# Altium PCB ESD-MAIN_PCB.PcbDoc
Units mm, origin at the board's own origin, x right, y up, seen from the top; angles counter-clockwise.
Board outline 75 x 100 mm, 2 copper layers (Top Layer, Bottom Layer), stack 1.57 mm thick; 48 components, 27 nets, 161 pads, 0 vias.
Unrouted connection lines stored in the file: 43.
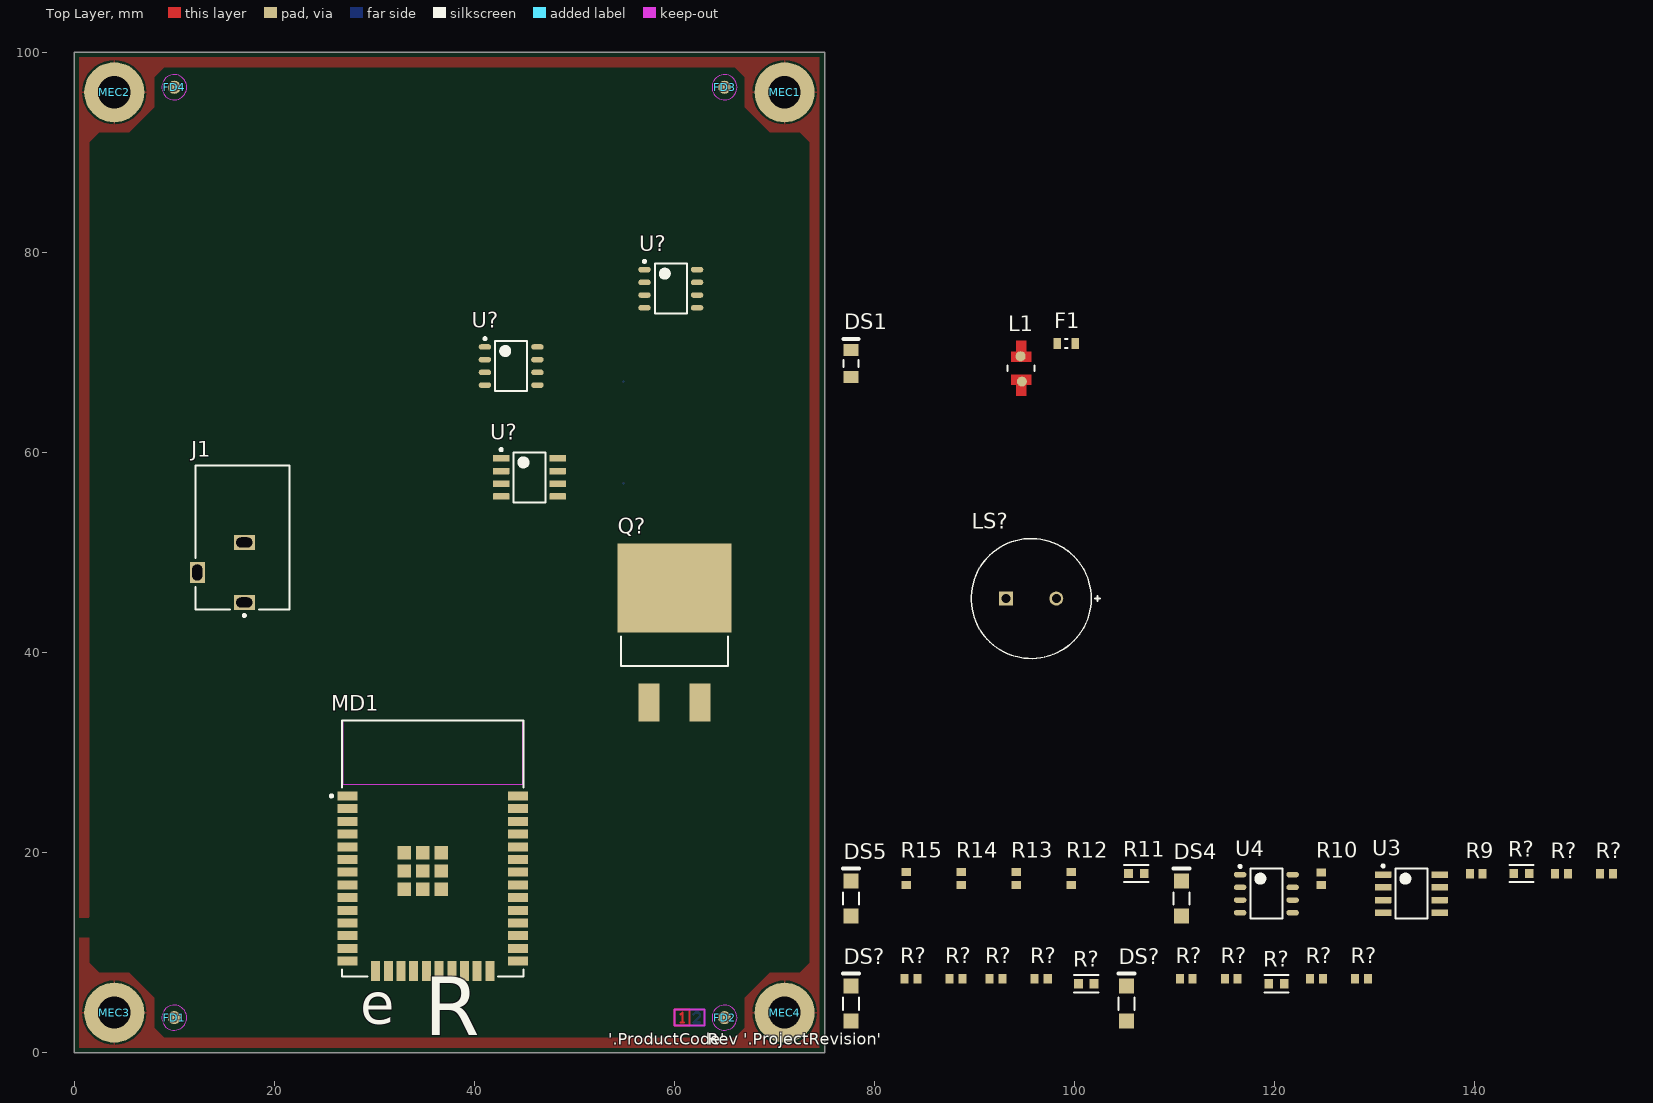
[diagram p0: Top Layer view]
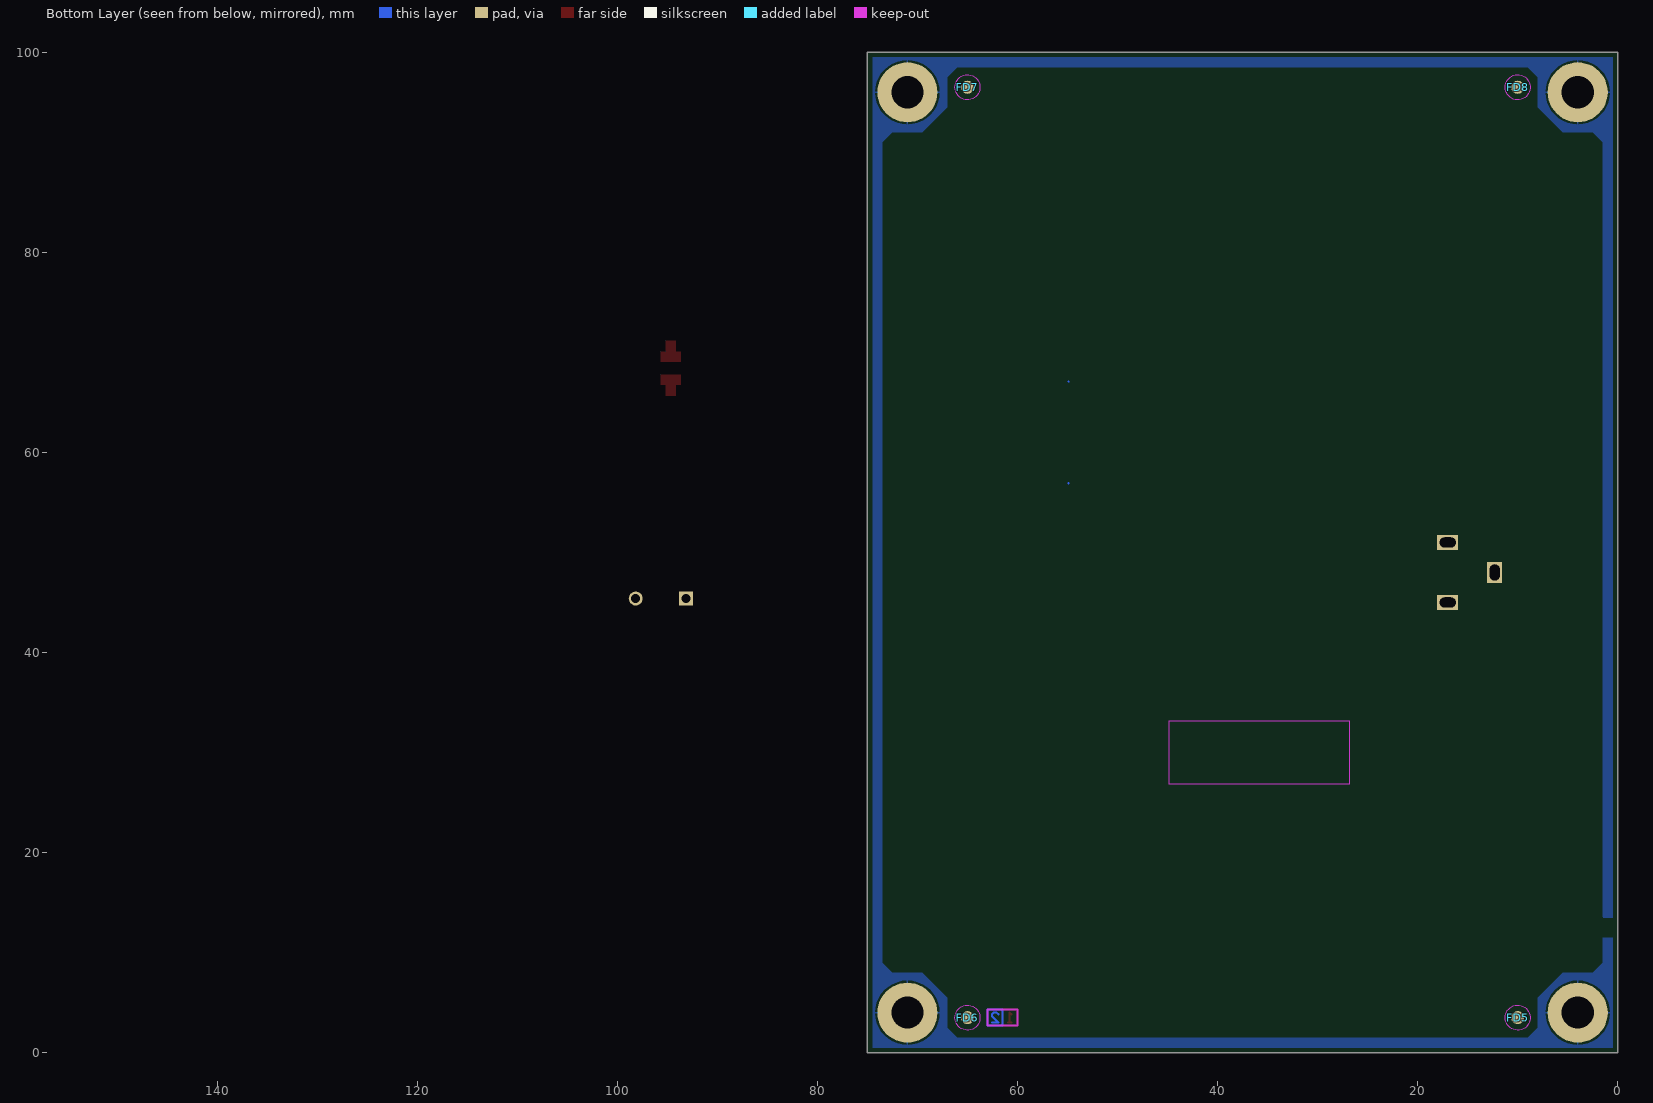
[diagram p1: Bottom Layer view, seen from below]

## Layer stack, top to bottom
Top Solder: solder mask 0.013, Solder Resist, Dk 3.5
Top Layer: signal copper 0.035
Dielectric 1: core 1.5, FR-4, Dk 4.2
Bottom Layer: signal copper 0.035
Bottom Solder: solder mask 0.013, Solder Resist, Dk 3.5

## Board outline
0,0 75,0 75,100 0,100

## Design rules (kind name [scope] priority, off if disabled: settings)
BoardOutlineClearance BoardOutlineClearance_layers [WithinRoom('layers_room')] p1: gap=0 ignorepadtopadclearanceinfootprint=FALSE
BoardOutlineClearance [All] p2: gap=0.5 ignorepadtopadclearanceinfootprint=FALSE
Clearance EARTH_Clearance [InNet('EARTH')] p1: gap=0.5 ignorepadtopadclearanceinfootprint=TRUE
Clearance [All] p2: gap=0.2 ignorepadtopadclearanceinfootprint=TRUE
DiffPairsRouting Diff_100ohmDiffPairsRouting [InDifferentialPairClass('Diff_100ohm')] p1: maxlimit=0.2 minlimit=0.2 mostfreqgap=0.2 toplayer_minwidth=0.16 toplayer_maxwidth=0.16 toplayer_prefwidth=0.16 bottomlayer_minwidth=0.16 bottomlayer_maxwidth=0.16 bottomlayer_prefwidth=0.16 maxuncoupledlength=12.7
DiffPairsRouting Diff_90ohmDiffPairsRouting [InDifferentialPairClass('Diff_90ohm')] p2: maxlimit=0.2 minlimit=0.2 mostfreqgap=0.2 toplayer_minwidth=0.2 toplayer_maxwidth=0.2 toplayer_prefwidth=0.2 bottomlayer_minwidth=0.2 bottomlayer_maxwidth=0.2 bottomlayer_prefwidth=0.2 maxuncoupledlength=5
DiffPairsRouting [All] p3: maxlimit=0.2 minlimit=0.2 mostfreqgap=0.2 toplayer_minwidth=0.16 toplayer_maxwidth=0.3 toplayer_prefwidth=0.2 bottomlayer_minwidth=0.16 bottomlayer_maxwidth=0.3 bottomlayer_prefwidth=0.2 maxuncoupledlength=12.7
HoleSize [All] p1: absolutevalues=TRUE maxlimit=6 minlimit=0.2 maxpercent=80.000 minpercent=20.000
HoleToHoleClearance [All] p1: gap=0.25 allowstackedmicrovias=TRUE
MatchedLengths ETH_iterpair_skew [InNetClass('ETH')] p1: tolerance=1.2 checknetsindiffpair=FALSE checkdiffpairvsdiffpair=TRUE checkxsignals=TRUE checkothers=TRUE
MatchedLengths GETH_interpair_skew [InNetClass('GETH')] p2: tolerance=15.2 checknetsindiffpair=FALSE checkdiffpairvsdiffpair=TRUE checkxsignals=TRUE checkothers=TRUE
MatchedLengths Diff_100ohm_intrapair_skew [InDifferentialPairClass('Diff_100ohm')] p3: tolerance=1.2 checknetsindiffpair=TRUE checkdiffpairvsdiffpair=FALSE checkxsignals=FALSE checkothers=FALSE
MatchedLengths Diff_90ohm_intrapair_skew [InDifferentialPairClass('Diff_90ohm')] p4: tolerance=1.2 checknetsindiffpair=TRUE checkdiffpairvsdiffpair=FALSE checkxsignals=FALSE checkothers=FALSE
MinimumSolderMaskSliver [All] p1: minsoldermaskwidth=0.01
PlaneClearance [All] p1: clearance=0.2
PlaneConnect [All] p1: pad.planeconnectstyle=Relief pad.reliefexpansion=0.2 pad.reliefentries=4 pad.reliefconductorwidth=0.2 pad.reliefairgap=0.2 via.planeconnectstyle=Direct via.reliefexpansion=0.2 via.reliefentries=4 via.reliefconductorwidth=0.2 via.reliefairgap=0.2
PolygonConnect [All] p1: thpad.connectstyle=Relief thpad.reliefconductorwidth=0.2 thpad.reliefentries=4 thpad.polygonreliefangle="90 Angle" thpad.airgapwidth=0.2 smdpad.connectstyle=Relief smdpad.reliefconductorwidth=0.2 smdpad.reliefentries=4 smdpad.polygonreliefangle="90 Angle" smdpad.airgapwidth=0.2 via.connectstyle=Direct via.reliefconductorwidth=0.2 via.reliefentries=4 via.polygonreliefangle="90 Angle" via.airgapwidth=0.2
RoutingVias [All] p1: holewidth=0.3 width=0.5 viastyle="Through Hole" minholewidth=0.2 minwidth=0.4 maxholewidth=1 maxwidth=1.6
SilkToSilkClearance [All] p1: silktosilkclearance=0.08
SilkToSolderMaskClearance [IsPad] p1: minsilkscreentomaskgap=0.06 clearancetoexposedcopper=TRUE
SolderMaskExpansion [All] p1: expansion=0.1 istentingtop=FALSE
SupplyNets "Schematic Supply Nets_8" [InNet('ERR_LO_PROG-')] p1: voltage=0.000
SupplyNets "Schematic Supply Nets_7" [InNet('ERR_HI_PROG+')] p2: voltage=0.000
SupplyNets "Schematic Supply Nets_6" [InNet('5V')] p3: voltage=0.000
SupplyNets "Schematic Supply Nets_5" [InNet('AGND')] p4: voltage=0.000
SupplyNets "Schematic Supply Nets_3" [InNet('EARTH')] p5: voltage=0.000
SupplyNets "Schematic Supply Nets_2" [InNet('3V3')] p6: voltage=0.000
SupplyNets "Schematic Supply Nets_1" [InNet('24VIN')] p7: voltage=0.000
SupplyNets "Schematic Supply Nets" [InNet('VBAT')] p8: voltage=0.000
Width [All] p1: maxlimit=6 minlimit=0.16 preferedwidth=0.2
22 further rules are at their usual default settings.

## Classes and differential pairs
component class ESD-OP: C7 C8 DS4 DS5 R9 R10 R11 R12 R13 R14 R15 R? U3 U4
component class ESD-MATT: DS? R?
component class Sheet2: C1 C2 C3 C4 DS1 F1 J1 L1 LS? Q? R1
component class ESD-HISTORY: _PCB1 FD1 FD2 FD3 FD4 FD5 FD6 FD7 FD8 MEC1 MEC2 MEC3 MEC4
component class ESD-ESP32: MD1

## Components (designator, comment, footprint, x,y, rotation, side; value= is the part's Value field where it differs from the comment)
DS1 "SML-LX1206IC-TR" LUMX-SML-LX1206IC_V 77.656,68.894 r90 top
DS4 "HSMH-C150" AVAG-HSMX-C150_V 110.656,15.394 r90 top
DS5 "HSMH-C150" AVAG-HSMX-C150_V 77.656,15.394 r90 top
DS? "HSMH-C150" AVAG-HSMX-C150_V 77.656,4.894 r90 top
DS? "HSMH-C150" AVAG-HSMX-C150_V 105.156,4.894 r90 top
F1 "0467.375NR" FP-467-MFG 99.156,70.894 r0 top
FD1 "Fiducial 1.3" "Fiducial 1.3mm" 10,3.5 r0 top
FD2 "Fiducial 1.3" "Fiducial 1.3mm" 65,3.5 r270 top
FD3 "Fiducial 1.3" "Fiducial 1.3mm" 65,96.5 r270 top
FD4 "Fiducial 1.3" "Fiducial 1.3mm" 10,96.5 r0 top
FD5 "Fiducial 1.3" "Fiducial 1.3mm" 10,3.5 r180 bottom
FD6 "Fiducial 1.3" "Fiducial 1.3mm" 65,3.5 r180 bottom
FD7 "Fiducial 1.3" "Fiducial 1.3mm" 65,96.5 r270 bottom
FD8 "Fiducial 1.3" "Fiducial 1.3mm" 10,96.5 r180 bottom
J1 "PJ-102B" CUI-PJ-102B_V 17,48 r90 top
L1 "LQH32CN101K23L" FP-LQH32CH_23-MFG 94.656,68.394 r90 top
LS? "SD1209T5-A1" FP-SD1209-MFG 95.656,45.394 r0 top
MD1 "ESP32-WROOM-32" FP-ESP32-WROOM-32-MFG 35.835,20.405 r0 top
MEC1 "M3" "M3 hole" 71,96 r0 top
MEC2 "M3" "M3 hole" 4,96 r0 top
MEC3 "M3" "M3 hole" 4,4 r0 top
MEC4 "M3" "M3 hole" 71,4 r0 top
Q? "IRLZ34NSTRLPBF" FP-PG-TO263-3-MFG 60,42 r0 top
R9 "CRCW06035M10FKEA" RESC1609X50X30NL10T20 140.156,17.894 r0 top
R10 "CRCW06035M10FKEA" RESC1609X50X30NL10T20 124.656,17.394 r90 top
R11 "AC0603FR-072KL" FP-AC0603-IPC_B 106.156,17.894 r0 top
R12 "CRCW0603100K0FKEA" RESC1609X50X30NL8T20 99.656,17.394 r90 top
R13 "CRCW060310K0FKEA" RESC1609X50X30NL8T20 94.156,17.394 r90 top
R14 "CRCW060310K0FKEA" RESC1609X50X30NL8T20 88.656,17.394 r90 top
R15 "CRCW0603100K0FKEA" RESC1609X50X30NL8T20 83.156,17.394 r90 top
R? "CRCW060310K0FKEA" RESC1609X50X30NL8T20 88.156,7.394 r0 top
R? "AC0603FR-072KL" FP-AC0603-IPC_B 120.156,6.894 r0 top
R? "CRCW06035M10FKEA" RESC1609X50X30NL10T20 115.656,7.394 r0 top
R? "CRCW06035M10FKEA" RESC1609X50X30NL10T20 111.156,7.394 r0 top
R? "CRCW0603100K0FKEA" RESC1609X50X30NL8T20 96.656,7.394 r0 top
R? "CRCW060310K0FKEA" RESC1609X50X30NL8T20 124.156,7.394 r0 top
R? "AC0603FR-072KL" FP-AC0603-IPC_B 101.156,6.894 r0 top
R? "AC0603FR-072KL" FP-AC0603-IPC_B 144.656,17.894 r0 top
R? "CRCW060310K0FKEA" RESC1609X50X30NL8T20 148.656,17.894 r0 top
R? "CRCW060310K0FKEA" RESC1609X50X30NL8T20 153.156,17.894 r0 top
R? "CRCW060310K0FKEA" RESC1609X50X30NL8T20 92.156,7.394 r0 top
R? "CRCW060310K0FKEA" RESC1609X50X30NL8T20 128.656,7.394 r0 top
R? "CRCW0603100K0FKEA" RESC1609X50X30NL8T20 83.656,7.394 r0 top
U3 "TLV2372IDR" D0008A_M 133.656,15.894 r0 top
U4 "LM393DT" STM-SO-8_D_L 119.156,15.894 r0 top
U? "LM393DT" STM-SO-8_D_L 59.625,76.365 r0 top
U? "TLV2372IDR" D0008A_M 45.5,57.5 r0 top
U? "LM393DT" STM-SO-8_D_L 43.675,68.635 r0 top

## Footprints (in the part's own frame and the unit in brackets; to place one, negate y for a bottom-side part, rotate by r counter-clockwise, add the part's x,y. Pads: shape width x height; smd on the part's side, far side on the other; paste and mask are expansions set on the pad)
AVAG-HSMX-C150_V [mm] "SMD, 2-Leads, Body 3.2x1.6mm"
  rect 1.5x1.5 smd: 1(-1.75,0) 2(1.75,0)
  silkscreen extent -0.6,-0.8 3,0.8, body extent -1.6,-0.8 1.6,0.8, height 1.1
CUI-PJ-102B_V [mm] "THD, 3-Leads, Body 14.4x9mm, Height 11mm"
  rect 1.5x2.1 hole 1 slot 1.6 at 90 deg: 1(-3,0) 2(3,0)
  rect 2.1x1.5 hole 1 slot 1.6 at 0 deg: 3(0,4.7)
  silkscreen extent -4.42,-4.5 10.7,4.9, body extent -3.7,-4.5 10.7,4.9, height 11
D0008A_M [mm] "SOIC, 8-Leads, Body 5x4mm, Pitch 1.27mm, IPC Low Density"
  rrect15% 1.65x0.65 smd: 1(-2.825,1.905) 2(-2.825,0.635) 3(-2.825,-0.635) 4(-2.825,-1.905) 5(2.825,-1.905) 6(2.825,-0.635) 7(2.825,0.635) 8(2.825,1.905)
  silkscreen extent -2.95,-2.5 1.6,2.9, body extent -3,-2.45 3,2.45, height 1.63
"Fiducial 1.3mm" [mm]
  round 1.3 smd mask+0.6: FD0(0,0)
  Top Layer keep-out circle w0.1: c0,0 r1.25
FP-467-MFG [mm]
  rect 0.762x1.09 smd paste+0 mask+0: 1(-0.891,0) 2(0.891,0)
  silkscreen extent -0.14,-0.44 0.14,0.44, body extent -1.37,-0.64 1.37,0.64, height 0.25
FP-AC0603-IPC_B [mm]
  rect 0.859x0.912 smd paste+0 mask+0: 1(-0.777,0) 2(0.777,0)
  silkscreen extent -1.21,-0.86 1.21,0.86, body extent -1.46,-0.71 1.46,0.71, height 0.25
FP-ESP32-WROOM-32-MFG [mm]
  rect 2x0.9 smd paste+0 mask+0: 1(-8.5,5.26) 2(-8.5,3.99) 3(-8.5,2.72) 4(-8.5,1.45) 5(-8.5,0.18) 6(-8.5,-1.09) 7(-8.5,-2.36) 8(-8.5,-3.63) 9(-8.5,-4.9) 10(-8.5,-6.17) 11(-8.5,-7.44) 12(-8.5,-8.71) 13(-8.5,-9.98) 14(-8.5,-11.25) 25(8.5,-11.25) 26(8.5,-9.98) 27(8.5,-8.71) 28(8.5,-7.44) 29(8.5,-6.17) 30(8.5,-4.9) 31(8.5,-3.63) 32(8.5,-2.36) 33(8.5,-1.09) 34(8.5,0.18) 35(8.5,1.45) 36(8.5,2.72) 37(8.5,3.99) 38(8.5,5.26)
  rect 0.9x2 smd paste+0 mask+0: 15(-5.715,-12.25) 16(-4.445,-12.25) 17(-3.175,-12.25) 18(-1.905,-12.25) 19(-0.635,-12.25) 20(0.635,-12.25) 21(1.905,-12.25) 22(3.175,-12.25) 23(4.445,-12.25) 24(5.715,-12.25)
  rect 1.33x1.33 smd paste+0 mask+0: 39(-2.835,-4.075) 39(-2.835,-2.24) 39(-2.835,-0.405) 39(-1,-4.075) 39(-1,-2.24) 39(-1,-0.405) 39(0.835,-4.075) 39(0.835,-2.24) 39(0.835,-0.405)
  Keep-Out Layer region: -9,6.45 9,6.45 9,12.75 -9,12.75
  Keep-Out Layer region: -9,6.45 9,6.45 9,12.75 -9,12.75
  silkscreen extent -10.25,-12.8 9.05,12.8, body extent -9.6,-13.35 9.6,12.9, height 0.25
FP-LQH32CH_23-MFG [mm]
  round 0.995 smd paste+0 mask+0: 1(-1.312,-0.062)
  round 1.012 smd paste+0 mask+0: 2(1.212,0.062)
  Top Layer region: 0.65,-1 0.65,1 1.65,1 1.65,0.5 2.75,0.5 2.75,-0.5 1.65,-0.5 1.65,-1
  Top Layer region: -1.65,-1 -1.65,-0.5 -2.75,-0.5 -2.75,0.5 -1.65,0.5 -1.65,1 -0.65,1 -0.65,-1
  silkscreen extent -0.27,-1.35 0.27,1.35, body extent -2.85,-1.45 2.85,1.45, height 0.25
FP-PG-TO263-3-MFG [mm]
  rect 2.08x3.81 smd paste+0 mask+0: 1(-2.54,-6.985) 3(2.54,-6.985)
  rect 11.43x8.89 smd paste+0 mask+0: 4(0,4.445)
  silkscreen extent -5.34,-3.36 5.34,-0.38, body extent -5.81,-8.99 5.81,8.99, height 0.25
FP-SD1209-MFG [mm]
  rect 1.4x1.4 hole 0.9 paste-2539.97 mask+0: 1(-2.5,0)
  round 1.4 hole 0.9 paste-2539.97 mask+0: 2(2.5,0)
  silkscreen extent -6,-6 6.85,6, body extent -6.1,-6.1 6.1,6.1, height 0.25
LUMX-SML-LX1206IC_V [mm] "SMD, 2-Leads, Body 3.2x1.5mm"
  rect 1.2x1.5 smd: 1(-1.35,0) 2(1.35,0)
  silkscreen extent -0.35,-0.75 2.45,0.75, body extent -1.6,-0.8 1.6,0.8, height 1.1
"M3 hole" [mm]
  round 6 hole 3.2: 0(0,0)
RESC1609X50X30NL8T20 [mm] "Chip Resistor, 2-Leads, Body 1.65x0.95mm, IPC Medium Density"
  rect 0.8x0.95 smd: 1(-0.65,0) 2(0.65,0)
  body extent -0.82,-0.48 0.82,0.48, height 0.5
RESC1609X50X30NL10T20 [mm] "Chip Resistor, 2-Leads, Body 1.55x0.85mm, IPC Medium Density"
  rect 0.8x0.95 smd: 1(-0.625,0) 2(0.625,0)
  body extent -0.82,-0.48 0.82,0.48, height 0.5
STM-SO-8_D_L [mm] "SOIC, 8-Leads, Body 5x4mm, Pitch 1.27mm, IPC High Density"
  oval 1.25x0.55 smd: 1(-2.625,1.905) 2(-2.625,0.635) 3(-2.625,-0.635) 4(-2.625,-1.905) 5(2.625,-1.905) 6(2.625,-0.635) 7(2.625,0.635) 8(2.625,1.905)
  silkscreen extent -2.75,-2.5 1.6,2.85, body extent -3,-2.5 3,2.5, height 1.75

## Part data
DS1: library part CMP-2000-07123-1, "LED Red, 65 mW, -40 to 85 degC, 2-Pin SMD, RoHS, Tape and Reel", Color=Red, Manufacturer=Lumex, Operating Temperature=-25to85C, Package Description="2-Pin Surface Mount Device, Body 3.2 x 1.5 mm", Package Reference=SML-LX1206IC, Reverse Voltage=5(Min)V, Supplier_Package=SMD, Datasheet URL=http://www.lumex.com/content/files/ProductAttachment/SML-LX1206IC-TR.pdf, Datasheet Version="Rev. J, 08/2012", Dimension=3.2x1.6x1.1mm, Dominant Wavelength=N/A, ECCN=EAR99, Family=SML-LX1206IC, HTS=8541402000, Intensity=6mcd, LED Material=GaAsP, Lens Appearance=ColorlessNonDiffused, Lens Dimensions=2x1.6x0.5mm, Manufacturer URL=http://www.lumexinstruments.com/, Mounting=SurfaceMount, Mounting Technology=SurfaceMount, Number of LEDs=1, Packaging=TapeandReel, Part No=SML-LX1206IC-TR, Peak Wavelength=635nm, Pin_Count=2, RoHS=Unknown, Supplier=Lumex, Supplier Standard Pack=3,000, Type=Uni-Color, Viewing Angle=160
DS4 DS5 DS? DS?: library part CMP-2000-06426-1, "LED Uni-Color Red, 65 mW, 25 mA, -40 to 85 degC, 2-Pin SMD, RoHS, Tape and Reel", Emitting Color=Red, Forward Current=25mA, Forward Voltage=2.6V, Manufacturer=Avago, Operating Temp Range=-40Cto85C, Operating Temperature Classification=Industrial, Package Description="2-Pin Surface Mount Device, Body 3.2 x 1.6 mm", Package Reference=HSMX-C150, Package Type=ChipLed, Power Dissipation=78W, Reverse Voltage=5V, Test Current (It)=20mA, Chip Material=GaAlAs, Datasheet URL=http://media.digikey.com/pdf/Data%20Sheets/Avago%20PDFs/HSMz-Czzz.pdf, Datasheet Version=03/2012, DELETED=Compliant, Dominant Wave Length=639nm, High Brightness=No, Lens Dimensions=2x1.6x0.6mm, Lens Type=ColorlessDiffused, Lum Intensity=17mcd, Luminous Intensity=17mcd, Main Category=ChipLED, Manufacturer URL=http://www.avagotech.com/, Mounting=SurfaceMount, Mounting Technology=SurfaceMount, Number of  Elements=1, Packaging=TapeandReel, Peak Wavelength=660nm, Pin Count=2, Product Depth (mm)=1.6mm, Product Height (mm)=1.1mm, Product Length (mm)=3.2mm, Rad Hardened=No, Shape Type=Rectangular, Type=Uni-Color, Viewing Angle=170deg
F1: library part CMP-08605-000028-1, "FUSE BOARD MOUNT 375MA 32VAC/VDC", Fuse Current=0.375A, Fuse Interrupt Ac Current=50A, Manufacturer=Littelfuse, Max Fuse Ac Voltage=32V, Package=467, Temperature="-55°C to +90°C", Temperature Range High=+90°C, Temperature Range Low=-55°C, Automotive=No, Category=Fuse, ComponentLink2Description=Datasheet, ComponentLink2URL=https://www.littelfuse.com/~/media/electronics/datasheets/fuses/littelfuse_fuse_467_datasheet.pdf.pdf, Device Class L1="Circuit Protection", Device Class L2=Fuses, Device Class L3=unset, Digikey Description="FUSE BOARD MOUNT 375MA 32VAC/VDC", Fuse Blow Speed=Fast, Fuse I2T=0.0035A2Sec, Fuse Interrupt Dc Current=50A, Height=0.432mm, Lead Free=Yes, Manufacturer Part Number=0467.375NR, Max Fuse Dc Voltage=32V, Mouser Description="Surface Mount Fuses 32V.375A VFA Slimline", Octopart=https://octopart.com/0467.375nr-littelfuse-565971, RoHS=TRUE, Voltage Rating=32V
FD1 FD2 FD3 FD4 FD5 FD6 FD7 FD8: "Fiducial 1.3mm"
J1: library part CMP-2000-06900-1, "Through Hole Right Angle DC Power Jack, 2.5 A, 2.5 mm Center Pin, 3 Position, -25 to 85 degC, RoHS, Bulk", Current Rating=2.5A, Flammability Rating=UL94V-0, Insulation Resistance=100MOhms, Manufacturer=CUIInc., Operating Temperature Range=-25Cto+85C, Package Description="3-Pin Through Hole Device, Body 14.4 x 9 mm, Height 11 mm", Voltage Rating=24V, Brand=CUI, Connector Type=DCPowerJack, Contact Gender=Male, Contact Material=Copper, Contact Plating=Nickel, Datasheet URL=http://www.cui.com/product/resource/pj-102b.pdf, Datasheet Version="Rev. 1.03, 04/2016", Factory Pack Quantity=280, Housing Material=PolybutyleneTerephthalate(PBT), Inside Contact Diameter=2.5mm, Manufacturer URL=http://www.cui.com/, Mounting Angle=Right, Mounting Style=ThroughHole, Mounting Technology=ThroughHole, Outside Contact Diameter=6.5mm, Package Reference=PJ-102B, Packaging=Bulk, Product=Jacks, Product Category=DCPowerConnectors, RoHS=True, Termination Style=ThroughHole
L1: library part CMP-06042-006648-2, "Wire Wound Ferrite Inductor for Power Lines 100μH ±10% 4.55Ω 100mA 1210", Case Code (Imperial)=1210, Case Code (Metric)=3225, Current=1.1A, Current Rating=100mA, DC Resistance (DCR)=3.5R, Frequency=10MHz, Inductance=100uH, Inductance Tolerance=10%, Inductor Type=Wirewound, Max Operating Temperature=85°C, Min Operating Temperature=-40°C, Package Quantity=2000, Test Frequency=1MHz, Case/Package=1210, Core Material=Ferrite, DC Current=100mA, Depth=2.7mm, Height=2mm, Lead Free="Lead Free", Length=3.2mm, Max DC Current=100mA, Military Standard=Not, Mount="Surface Mount", Number of Pins=2, Packaging="Tape and Reel", Q Factor=40, Radiation Hardening=No, Rated Current-Max=100mA, REACH SVHC="No SVHC", RoHS Compliant=Yes, Self Resonant Frequency=10MHz, Series=LQH32C_33, Shielding=Unshielded, Termination=SMD/SMT, Tolerance=10%, Weight=0.002116oz, Width=2.5mm
LS?: library part CMP-08413-000009-1, "AUDIO MAGNETIC XDCR 3-6V TH", Current Rating=60mA, Frequency=2.048kHz, Max Operating Temperature=85°C, Min Operating Temperature=-40°C, Operating Supply Voltage=5V, Package Quantity=100, Self Resonant Frequency=2.05kHz, Diameter=12mm, Height=9mm, Lead Free="Lead Free", Max Supply Current=60mA, Mount="Through Hole", Number of Pins=2, Number of Terminals/Pins=2, Operating Supply Current=60mA, Packaging=Tray, Sensing Method=Magnetic, Series=SD, Termination="PC Pins", Voltage Rating (DC)=5V, Washable=No
MD1: library part CMP-194065-000008-1, "RX TXRX MOD WIFI SURFACE MOUNT", Case/Package=SMD/SMT, Frequency=2.5GHz, Max Operating Temperature=85°C, Min Operating Temperature=-40°C, Operating Supply Voltage=3.6V, Package Quantity=550, Data Rate=150Mbps, Mount="Surface Mount", Packaging="Cut Tape", Sensitivity=-98dBm, Weight=0.088185oz
MEC1 MEC2 MEC3 MEC4: library part "M3 hole", "M3 hole"
Q?: library part CMP-32901-001250-1, "MOSFET N-CH 55V 30A D2PAK", Case/Package=D2PAK, Continuous Drain Current (ID)=30A, Drain to Source Resistance=60mR, Drain to Source Voltage (Vdss)=55V, Gate to Source Voltage (Vgs)=16V, Input Capacitance=880pF, Max Operating Temperature=175°C, Max Power Dissipation=3.8W, Min Operating Temperature=-55°C, Power Dissipation=68W, Threshold Voltage=2V, Element Configuration=Single, Halogen Free="Halogen Free", Height=0.19inch, Lead Free="Contains Lead", Length=0.42inch, Max Dual Supply Voltage=55V, Mount="Surface Mount", Number of Pins=3, Packaging="Cut Tape", Rds On Max=35mR, Reach SVHC Compliant=Yes, RoHS Compliant=Yes, Series=HEXFET®, Turn-Off Delay Time=21ns, Turn-On Delay Time=8.9ns, Width=0.38inch
R9 R10 R? R?: library part CMP-2000-03491-1, Manufacturer="Vishay Dale", Part Number=CRCW06035M10FKEA
R11 R? R? R?: library part CMP-2000-04836-2, "RES 2kΩ 1.00% 0.1W 0603", Case Code (Imperial)=0603, Case Code (Metric)=1608, Max Operating Temperature=155°C, Max Power Dissipation=100mW, Min Operating Temperature=-55°C, Ratings=AEC-Q200, Resistance=2kR, Resistor Type="Thick Film", Temperature Coefficient=100ppm/°C, Tolerance=1%, Voltage Rating=50V, Case/Package=0603, Construction=Rectangular, Depth=0.8mm, Features="Moisture Resistant", Height=0.45mm, Lead Free="Lead Free", Length=1.6mm, Military Standard=Not, Number of Terminations=2, Packaging="Tape and Reel", Power Rating=100mW, Series=AC, Size Code=0603, Termination=SMD/SMT, Width=0.8mm
R12 R15 R? R?: library part CMP-1666-00005-4, "Chip Resistor, 100 KOhm, +/- 1%, 100 mW, -55 to 155 degC, 0603 (1608 Metric), RoHS, Tape and Reel", Manufacturer="Vishay Semiconductor", Max Operating Temperature="155 degC", Min Operating Temperature="-55 degC", Package Quantity=5000, Voltage Rating="75 V", ComponentLink1Description="Manufacturer URL", ComponentLink1URL=http://www.vishay.com/, ComponentLink2Description=Datasheet, ComponentLink2URL=https://datasheet.ciiva.com/11809/0900766b80d98afc-11809037.pdf, DatasheetVersion=06/2012, Height="0.45 mm", Length="1.55 mm", Mounting Technology="Surface Mount", PackageDescription="2-Pin Surface Mount Device, Body 1.575 x 0.85 mm", PackageReference=0603, Packaging="Tape and Reel", REACH SVHC=Unknown, RoHSCompliant=true
R13 R14 R? R? R? R? R? R?: library part CMP-1666-00005-4, "Chip Resistor, 10 KOhm, +/- 1%, 100 mW, -55 to 155 degC, 0603 (1608 Metric), RoHS, Tape and Reel", Manufacturer="Vishay Semiconductor", Max Operating Temperature="155 degC", Min Operating Temperature="-55 degC", Package Quantity=5000, Voltage Rating="75 V", ComponentLink1Description="Manufacturer URL", ComponentLink1URL=http://www.vishay.com/, ComponentLink2Description=Datasheet, ComponentLink2URL=https://datasheet.ciiva.com/11809/0900766b80d98afc-11809037.pdf, DatasheetVersion=06/2012, Height="0.45 mm", Length="1.55 mm", Mounting Technology="Surface Mount", PackageDescription="2-Pin Surface Mount Device, Body 1.575 x 0.85 mm", PackageReference=0603, Packaging="Tape and Reel", REACH SVHC=Unknown, RoHSCompliant=true
U3 U?: library part CMP-0272-02948-3, "550 uA/Ch, 3 MHz, RRIO Operational Amplifier, 2.7 to 16 V, -40 to 125 degC, 8-pin SOIC (D8), Green (RoHS & no Sb/Br)", Manufacturer="Texas Instruments", Rating=Catalog, Total Supply Voltage(Max)(+5V is 5, +/-5V is 10)=16, Total Supply Voltage(Min)(+5V is 5, +/-5V is 10)=2.7, CMRR(Min)(dB)=50, Code_JEDEC=MS-012, ComponentLink1Description="Manufacturer URL", ComponentLink1URL=http://www.ti.com/, ComponentLink2Description=Datasheet, ComponentLink2URL=http://www.ti.com/lit/ds/symlink/tlv2372.pdf, ComponentLink3Description="Package Specification", ComponentLink3URL=http://www.ti.com/litv/pdf/msoi002j, DatasheetVersion=SLOS270D, Eco-Plan="Green (RoHS & no Sb/Br)", GBW(Typ)(MHz)=3, IIB(Max)(pA)=60, Iq per channel(Max)(mA)=0.9, Mounting Technology="Surface Mount", Number of Channels=2, Offset Drift(Typ)(uV/C)=2, PackageDescription="8-Pin Plastic Small Outline, Body 4.9 x 3.9 mm, Pitch 1.27 mm", PackageReference=D0008A, PackageVersion="4040047-3/M, 06/2011", Packing="LARGE T&R", PartNumber=TLV2372IDR, Slew Rate(Typ)(V/us)=2.4, Sub Family="Low Supply Voltage Amplifier (<=2.7V), Precision Amplifier", Vio (25C)(Max)(mV)=4.5
U4 U? U?: library part CMP-2000-06550-1, "Low-Power, Dual-Voltage Comparator, 2 to 36 V, 0 to 70 degC, 8-Pin SOIC (SO), RoHS, Tape and Reel", Current - Input Bias (Max)=0.25µA@5V, Current - Output (Typ)=18mA@5V, Current - Quiescent (Max)=2.5mA, Manufacturer=STMicroelectronics, Operating Temperature=0°C~70°C, Package / Case="8-SOIC(0.154\",3.90mmWidth)", Package Description="8-Pin Small Outline Integrated Circuit, Body 4.9 x 3.9 mm, Pitch 1.27 mm", Package Reference=SO-8, Standard Package=2,500, Supplier Device Package=8-SO, Voltage - Input Offset (Max)=5mV@30V, Voltage - Supply, Single/Dual (±)=2V~36V,±1V~18V, Category=IntegratedCircuits(ICs), Datasheet URL=http://www.st.com/content/ccc/resource/technical/document/datasheet/group1/b4/cc/cf/13/18/28/44/f5/CD00000465/files/CD00000465.pdf/jcr:content/translations/en.CD00000465.pdf, Datasheet Version="Rev. 15, 02/2016", EDA / CAD Models=DownloadfromAcceleratedDesigns, Family=Linear-Comparators, Manufacturer URL=http://www.st.com/, Mounting Technology=SurfaceMount, Mounting Type=SurfaceMount, Number of Elements=2, Online Catalog=Comparators-2elements, Other Names=497-1593-2, Other Related Documents=LM393ViewAllSpecificationsLM393ViewAllSpecifications, Output Type=CMOS,DTL,ECL,MOS,Open-Collector,TTL, Packaging=Tape&Reel(TR), Type=GeneralPurpose

## Nets (pads, with @x,y where several pads share a name; then routed paths per layer and width w, separated by ;. In a path a pad name is that pad's centre, name@x,y a point inside that pad or via, vN(x,y) a via of type N, cw(c..) or ccw(c..) an arc to the next point about the centre after c; other vN are vias at no path point)
5V: L1.2
EARTH: MEC1.0 MEC2.0 MEC3.0 MEC4.0
ERR_HI_OD: DS4.1
ERR_HI_PROG+: R9.2 R15.1 R?.1@83.006,7.394 R?.2@116.281,7.394 R?.2@124.806,7.394 R?.2@149.306,17.894 U3.8 U4.8 U?.8@48.325,59.405 U?.8@62.25,78.27
ERR_HI_PROG-: R?.1@96.006,7.394 R?.2@120.933,6.894 U?.3@57,75.73
ERR_LO_OD: DS?.1@77.656,3.144
ERR_LO_PROG+: R?.2@84.306,7.394 R?.2@129.306,7.394 U?.6@46.3,68
ERR_LO_PROG-: DS1.2 J1.2 J1.3 R12.2 R13.1 R?.1@91.506,7.394 R?.1@128.006,7.394 R?.1@152.506,17.894 R?.2@97.306,7.394 U3.4 U4.4 U?.4@42.675,55.595 U?.4@57,74.46
NetC1_2: F1.2 L1.1
NetC8_2: R11.2 U3.3
NetC?_2: R?.2@101.933,6.894 U?.3@42.675,56.865
NetDS1_1: DS1.1
NetDS4_2: DS4.2 U4.1
NetDS5_2: DS5.2 U4.7
NetDS?_2: DS?.2@105.156,6.644 U?.1@57,78.27
NetF1_1: F1.1 J1.1
NetLabel1: MD1.25
NetLabel2: MD1.1
NetLabel3: MD1.15
NetLabel4: MD1.34
NetLabel5: MD1.35
NetR9_1: R9.1 R10.2
NetR10_1: R10.1 R11.1
NetR13_2: R13.2 R14.1 U3.2
NetR14_2: R14.2 U3.1 U4.2 U4.5
NetR?_1: R?.1@143.88,17.894 R?.1@148.006,17.894
NetR?_2: R?.2@88.806,7.394 U?.1@42.675,59.405 U?.2@57,77 U?.5@46.3,66.73
pads on no net: DS5.1 DS?.1@105.156,3.144 DS?.2@77.656,6.644 FD1.FD0 FD2.FD0 FD3.FD0 FD4.FD0 FD5.FD0 FD6.FD0 FD7.FD0 FD8.FD0 LS?.1 LS?.2 MD1.2 MD1.3 MD1.4 MD1.5 MD1.6 MD1.7 MD1.8 MD1.9 MD1.10 MD1.11 MD1.12 MD1.13 MD1.14 MD1.16 MD1.17 MD1.18 MD1.19 MD1.20 MD1.21 MD1.22 MD1.23 MD1.24 MD1.26 MD1.27 MD1.28 MD1.29 MD1.30 MD1.31 MD1.32 MD1.33 MD1.36 MD1.37 MD1.38 MD1.39 Q?.1 Q?.3 Q?.4 R12.1 R15.2 R?.1@87.506,7.394 R?.1@100.38,6.894 R?.1@110.531,7.394 R?.1@115.031,7.394 R?.1@119.38,6.894 R?.1@123.506,7.394 R?.2@92.806,7.394 R?.2@111.781,7.394 R?.2@145.433,17.894 R?.2@153.806,17.894 U3.5 U3.6 U3.7 U4.3 U4.6 U?.1@41.05,70.54 U?.2@41.05,69.27 U?.2@42.675,58.135 U?.3@41.05,68 U?.4@41.05,66.73 U?.5@48.325,55.595 U?.5@62.25,74.46 U?.6@48.325,56.865 U?.6@62.25,75.73 U?.7 U?.8@46.3,70.54
copper on no net: | length 16.6
  Top Layer w0.2: 60.6,3 60.775,3 ; 60.6,3.825 60.775,4 60.775,3 ; 60.95,3 60.775,3 ; 60,2.7 60,4.3 61.5,4.3 61.5,2.7 60,2.7
  Bottom Layer w0.2: 54.88,56.904 54.896,56.92 ; 54.88,67.096 54.896,67.08 ; 61.9,3.825 62.075,4 62.4,4 62.55,3.85 62.55,3.65 61.9,3 62.55,3 ; 61.5,2.7 63,2.7 63,4.3 61.5,4.3 61.5,2.7

## Polygon pours and split planes (outlines as drawn)
EARTH on Top Layer "EARTH_top" (solid, remove dead copper, pour order 10): 0,100 75,100 75,0 0,0 0,11.5 1.499,11.5 1.501,8.999 2.5,8 5.5,8 8,5.5 8,2.5 9,1.5 66,1.5 67,2.5 67,5.5 69.5,8 72.5,8 73.5,9 73.5,91 72.499,92.001 69.499,92.001 67,94.5 67,97.5 66.005,98.5 9,98.5 8.009,97.509 8.009,94.509 5.5,92 2.5,92 1.501,91.001 1.501,13.5 0,13.5
EARTH on Bottom Layer "EARTH_bot" (solid, remove dead copper, pour order 46): 0,100 75,100 75,0 0,0 0,11.5 1.499,11.5 1.501,8.999 2.5,8 5.5,8 8,5.5 8,2.5 9,1.5 66,1.5 67,2.5 67,5.5 69.5,8 72.5,8 73.5,9 73.5,91 72.499,92.001 69.499,92.001 67,94.5 67,97.5 66.005,98.5 9,98.5 8.009,97.509 8.009,94.509 5.5,92 2.5,92 1.501,91.001 1.501,13.5 0,13.5

## Keep-outs
Keep-Out Layer:
  lines w0.2: 60,2.7 60,4.3 63,4.3 63,2.7 60,2.7
  text "'.Layer_Name'" at 174.2,-30.55 h2.5

## Other copper
Top Layer:
  text "'.Layer_Name'" at 174.2,-30.55 h2.5
Bottom Layer:
  text "'.Layer_Name'" at 174.2,-30.55 h2.5

## Silkscreen, mask and mechanical layers (free items; w line width, h text height)
Top Overlay:
  text "e" at 28.6,1.531 h7
  text "'.ProductCode'" at 53.4,0.4 h2
  text "Rev '.ProjectRevision'" at 63.3,0.4 h2
  text "R" at 35,-0.2 h10
  text "'.Layer_Name'" at 174.2,-30.55 h2.5
Bottom Overlay:
  text "'.Layer_Name'" at 174.2,-30.55 h2.5
Top Paste:
  text "'.Layer_Name'" at 174.2,-30.55 h2.5
Bottom Paste:
  text "'.Layer_Name'" at 174.2,-30.55 h2.5
Top Solder:
  rectangle: 59.9,2.5 63.2,4.5
  lines w0.2: 59.8,2.7 ccw(c60,2.7) 60,2.5 63,2.5 ccw(c63,2.7) 63.2,2.7 63.2,4.3 ccw(c63,4.3) 63,4.5 60,4.5 ccw(c60,4.3) 59.8,4.3 59.8,2.7
  text "'.Layer_Name'" at 174.2,-30.55 h2.5
Bottom Solder:
  rectangle: 59.9,2.5 63.2,4.5
  lines w0.2: 59.8,2.7 ccw(c60,2.7) 60,2.5 63,2.5 ccw(c63,2.7) 63.2,2.7 63.2,4.3 ccw(c63,4.3) 63,4.5 60,4.5 ccw(c60,4.3) 59.8,4.3 59.8,2.7
  text "p" at 32.5,2.5 h4
  text "'.Layer_Name'" at 174.2,-30.55 h2.5
Drill Guide:
  text "'.Layer_Name'" at 174.2,-30.55 h2.5
Board Edge:
  the board outline again, w0.2
Dimension:
  text "'.Layer_Name'" at 174.2,-30.55 h2.5
Route Tool:
  text "'.Layer_Name'" at 174.2,-30.55 h2.5
3D Body:
  text "'.Layer_Name'" at 174.2,-30.55 h2.5
Mechanical 8:
  text "'.Layer_Name'" at 174.2,-30.55 h2.5
Component Guard:
  text "'.Layer_Name'" at 174.2,-30.55 h2.5
Sheet:
  drawing of 353 lines, arcs and shapes, not listed
  text "1" at 5.246,142.611 h1.78
  text "2" at 77.89,142.611 h1.78
  text "3" at 151.042,142.611 h1.78
  text "4" at 223.94,142.611 h1.78
  text "Specifications" at 216.106,136.704 h1.52
  text "Material" at 193.881,134.101 h1.52
  text "Process" at 203.66,134.101 h1.52
  text "PCB" at 215.598,134.101 h1.52
  text "Silk" at 235.093,134.101 h1.52
  text "Mask" at 244.427,134.101 h1.52
  text "Copper" at 225.381,134.095 h1.52
  text "CEM" at 194.897,131.688 h1.52
  text "H.A.L." at 204.676,131.688 h1.52
  text "1,0mm" at 216.551,131.688 h1.52
  text "17um" at 226.33,131.688 h1.52
  text "LC" at 236.172,131.688 h1.52
  text "LC" at 245.507,131.688 h1.52
  text "FR-2" at 194.897,129.91 h1.52
  text "LeadFree" at 204.676,129.91 h1.52
  text "35um" at 226.33,129.91 h1.52
  text "LS" at 236.172,129.91 h1.52
  text "LS" at 245.507,129.91 h1.52
  text "1,6mm" at 216.589,129.892 h1.52
  text "FR-4" at 194.897,128.132 h1.52
  text "Flash G." at 204.676,128.132 h1.52
  text "70um" at 226.33,128.132 h1.52
  text "LC/LS" at 236.172,128.132 h1.52
  text "LC/LS" at 245.507,128.132 h1.52
  text "2,4mm" at 216.589,127.987 h1.52
  text "Spec." at 194.897,126.354 h1.52
  text "Spec." at 204.676,126.354 h1.52
  text "Spec." at 226.33,126.354 h1.52
  text "Spec." at 216.589,126.209 h1.52
  text "Color" at 235.093,125.782 h1.52
  text "Color" at 244.427,125.782 h1.52
  text "ACCORDING STACK UP" at 203.533,123.727 h1.27
  text "Special:" at 193.818,123.699 h1.52
  text "White" at 236.172,123.687 h1.52
  text "Green" at 245.443,123.687 h1.52
  text "Yellow" at 236.172,121.909 h1.52
  text "Blue" at 245.443,121.909 h1.52
  text "Tolerance:" at 193.818,121.21 h1.52
  text "Holes +-0,1mm" at 206.264,121.21 h1.52
  text "Espec." at 236.172,120.131 h1.52
  text "Espec." at 245.443,120.131 h1.52
  text "A" at -29.095,119.599 h1.78
  text "A" at 257.925,119.599 h1.78
  text "Mechanical +-0,2mm" at 206.264,119.496 h1.52
  text "Layer" at 139.828,112.763 h1.52
  text "Name" at 150.24,112.763 h1.52
  text "Material" at 173.856,112.763 h1.52
  text "Thickness" at 195.694,112.763 h1.52
  text "Constant" at 212.2,112.763 h1.52
  text "Board Layer Stack" at 226.674,112.763 h1.52
  text "Top Overlay" at 150.24,109.715 h1.52
  text "Top Solder" at 150.24,106.667 h1.52
  text "Solder Resist" at 173.856,106.667 h1.52
  text "0.013mm" at 195.694,106.667 h1.52
  text "3.5" at 212.2,106.667 h1.52
  text "1" at 139.828,103.619 h1.52
  text "Top Layer" at 150.24,103.619 h1.52
  text "0.035mm" at 195.694,103.619 h1.52
  text "Dielectric 1" at 150.24,100.571 h1.52
  text "FR-4" at 173.856,100.571 h1.52
  text "1.500mm" at 195.694,100.571 h1.52
  text "4.2" at 212.2,100.571 h1.52
  text "2" at 139.828,97.523 h1.52
  text "Bottom Layer" at 150.24,97.523 h1.52
  text "0.035mm" at 195.694,97.523 h1.52
  text "Bottom Solder" at 150.24,94.475 h1.52
  text "Solder Resist" at 173.856,94.475 h1.52
  text "0.013mm" at 195.694,94.475 h1.52
  text "3.5" at 212.2,94.475 h1.52
  text "Bottom Overlay" at 150.24,91.427 h1.52
  text "B" at -29.095,71.542 h1.78
  text "B" at 257.925,71.542 h1.78
  text "C" at -29.095,23.028 h1.78
  text "C" at 257.925,23.028 h1.78
  text "***" at 167,-21 h3.5
  text "D" at -29.095,-24.978 h1.78
  text "D" at 257.925,-24.978 h1.78
  text "Project:" at 167,-25.5 h2.5
  text "*" at 175,-25.5 h2.5
  text "Layer:" at 167,-30.5 h2.5
  text "Engineer:" at 167,-35.5 h2.5
  text "*" at 177,-35.5 h2.5
  text "Project Code:" at 225,-35.5 h2.5
  text ".ProductCode" at 239.5,-35.5 h2.5
  text "Date:" at 167,-40.5 h2.5
  text "'.Print_Date'" at 173,-40.5 h2.5
  text "Revision:" at 196,-40.5 h2.5
  text "'.ProjectRevision'" at 206,-40.5 h2.5
  text "Size:" at 225,-40.5 h2.5
  text "A4" at 231,-40.5 h2.5
  text "1" at 5.246,-45.349 h1.78
  text "2" at 77.89,-45.349 h1.78
  text "3" at 151.042,-45.349 h1.78
  text "4" at 223.94,-45.349 h1.78
Drill Drawing:
  circle w0.254: c114.781,78.06 r0.847
  lines w0.254: 113.935,73.403 115.628,73.403 115.628,75.097 113.935,75.097 113.935,73.403 ; 113.935,82.717 115.628,82.717 114.781,81.023 113.935,82.717
  lines w0.381: 112.416,72.26 253.5,72.26 ; 112.416,83.69 253.5,83.69 ; 126.408,68.45 126.408,87.5 ; 138.597,68.45 138.597,87.5 ; 167.798,68.45 167.798,87.5 ; 180.648,68.45 180.648,87.5 ; 199.286,68.45 199.286,87.5 ; 237.375,68.45 237.375,87.5 ; 112.416,68.45 253.5,68.45 253.5,87.5 112.416,87.5 112.416,68.45
  text "Symbol" at 114.702,84.833 h1.83
  text "Count" at 127.551,84.833 h1.83
  text "Hole Size" at 139.74,84.833 h1.83
  text "Plated" at 168.941,84.833 h1.83
  text "Hole Type" at 181.791,84.833 h1.83
  text "Drill Layer Pair" at 200.429,84.833 h1.83
  text "Via/Pad" at 238.518,84.833 h1.83
  text "2" at 127.551,81.023 h1.52
  text "0.900mm (35.43mil)" at 139.74,81.023 h1.52
  text "PTH" at 168.941,81.023 h1.52
  text "Round" at 181.791,81.023 h1.52
  text "Top Layer - Bottom Layer" at 200.429,81.023 h1.52
  text "Pad" at 238.518,81.023 h1.52
  text "3" at 127.551,77.213 h1.52
  text "1.000mm (39.37mil)" at 139.74,77.213 h1.52
  text "PTH" at 168.941,77.213 h1.52
  text "Slot" at 181.791,77.213 h1.52
  text "Top Layer - Bottom Layer" at 200.429,77.213 h1.52
  text "Pad" at 238.518,77.213 h1.52
  text "4" at 127.551,73.403 h1.52
  text "3.200mm (125.98mil)" at 139.74,73.403 h1.52
  text "PTH" at 168.941,73.403 h1.52
  text "Round" at 181.791,73.403 h1.52
  text "Top Layer - Bottom Layer" at 200.429,73.403 h1.52
  text "Pad" at 238.518,73.403 h1.52
  text "9 Total" at 127.551,69.593 h1.52
  text "Slot definitions :" at 114.702,65.911 h1.52
  text "Routed Path Length" at 140.932,65.911 h1.52
  text "= Calculated from tool start centre position to tool end centre position." at 168.94,65.911 h1.52
  text "Hole Length" at 140.932,63.372 h1.52
  text "= Routed Path Length + Tool Size = Slot length as defined in the PCB layout" at 158.529,63.372 h1.52
  text "'.Layer_Name'" at 174.2,-30.55 h2.5
  text "'.Layer_Name'" at 174.2,-30.55 h2.5

## Dimensions
4,4 to 4,96 on Dimension
4,4 to 71,4 on Dimension
0,100 to 0,0 on Dimension
0,100 to 75,100 on Dimension